# Altium PCB PCB1.PcbDoc (part 1 of 3)
Units mm, origin at the board's own origin, x right, y up, seen from the top; angles counter-clockwise.
Board outline 131.32 x 71.5 mm, 2 copper layers (Top Layer, Bottom Layer); 122 components, 132 nets, 671 pads, 363 vias.
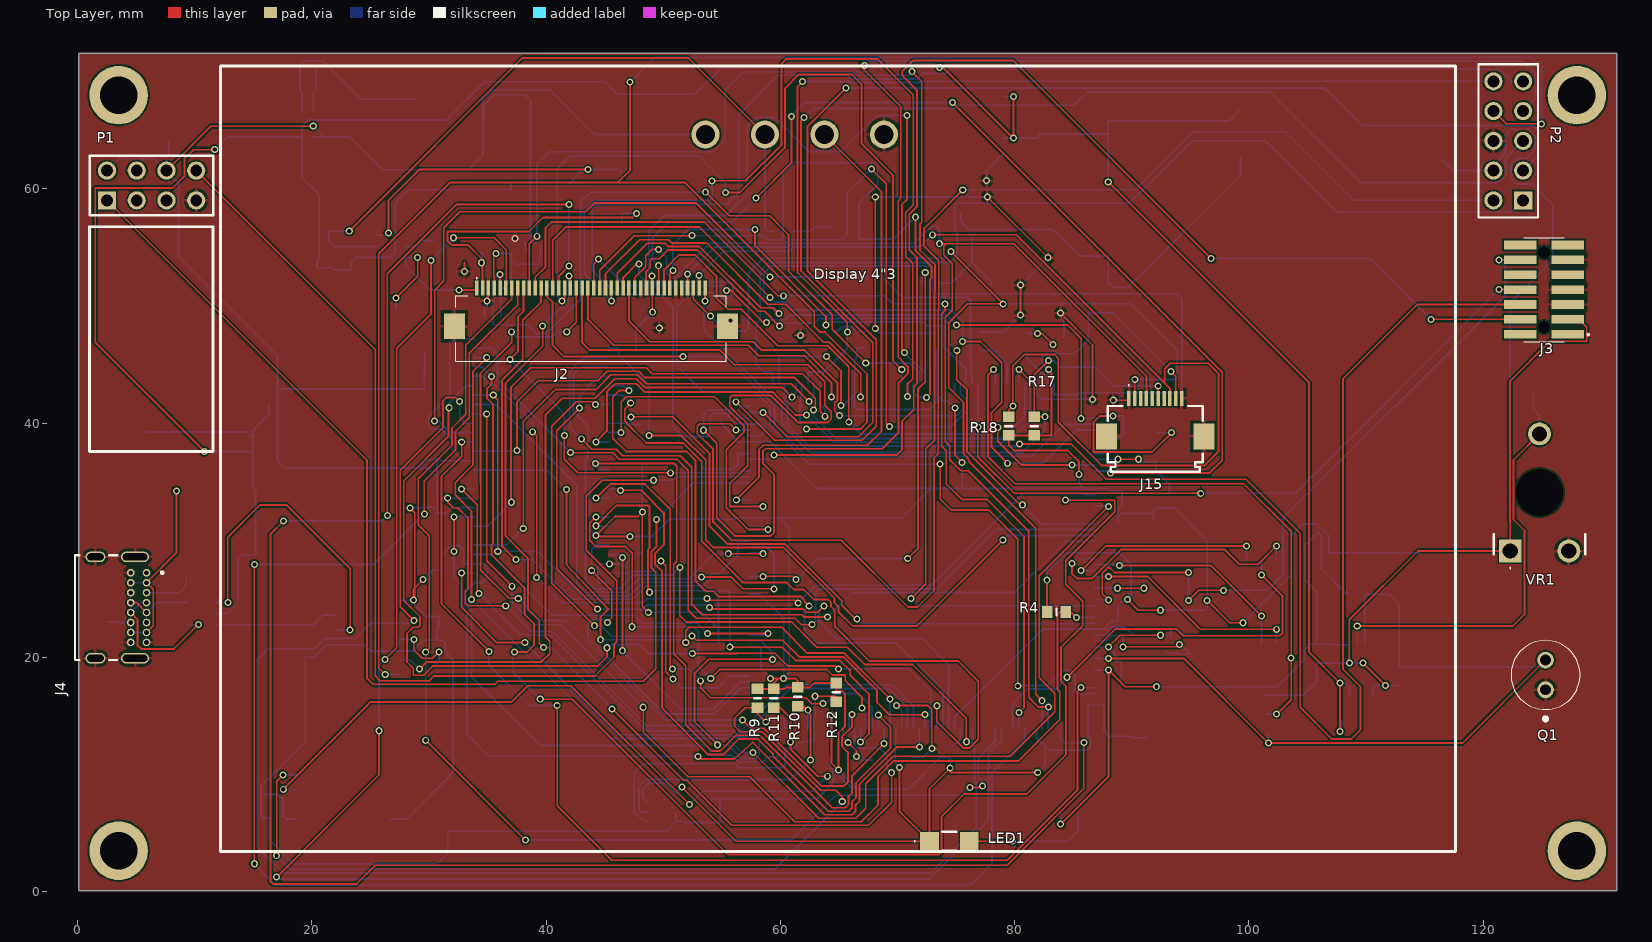
[diagram p0: Top Layer view]
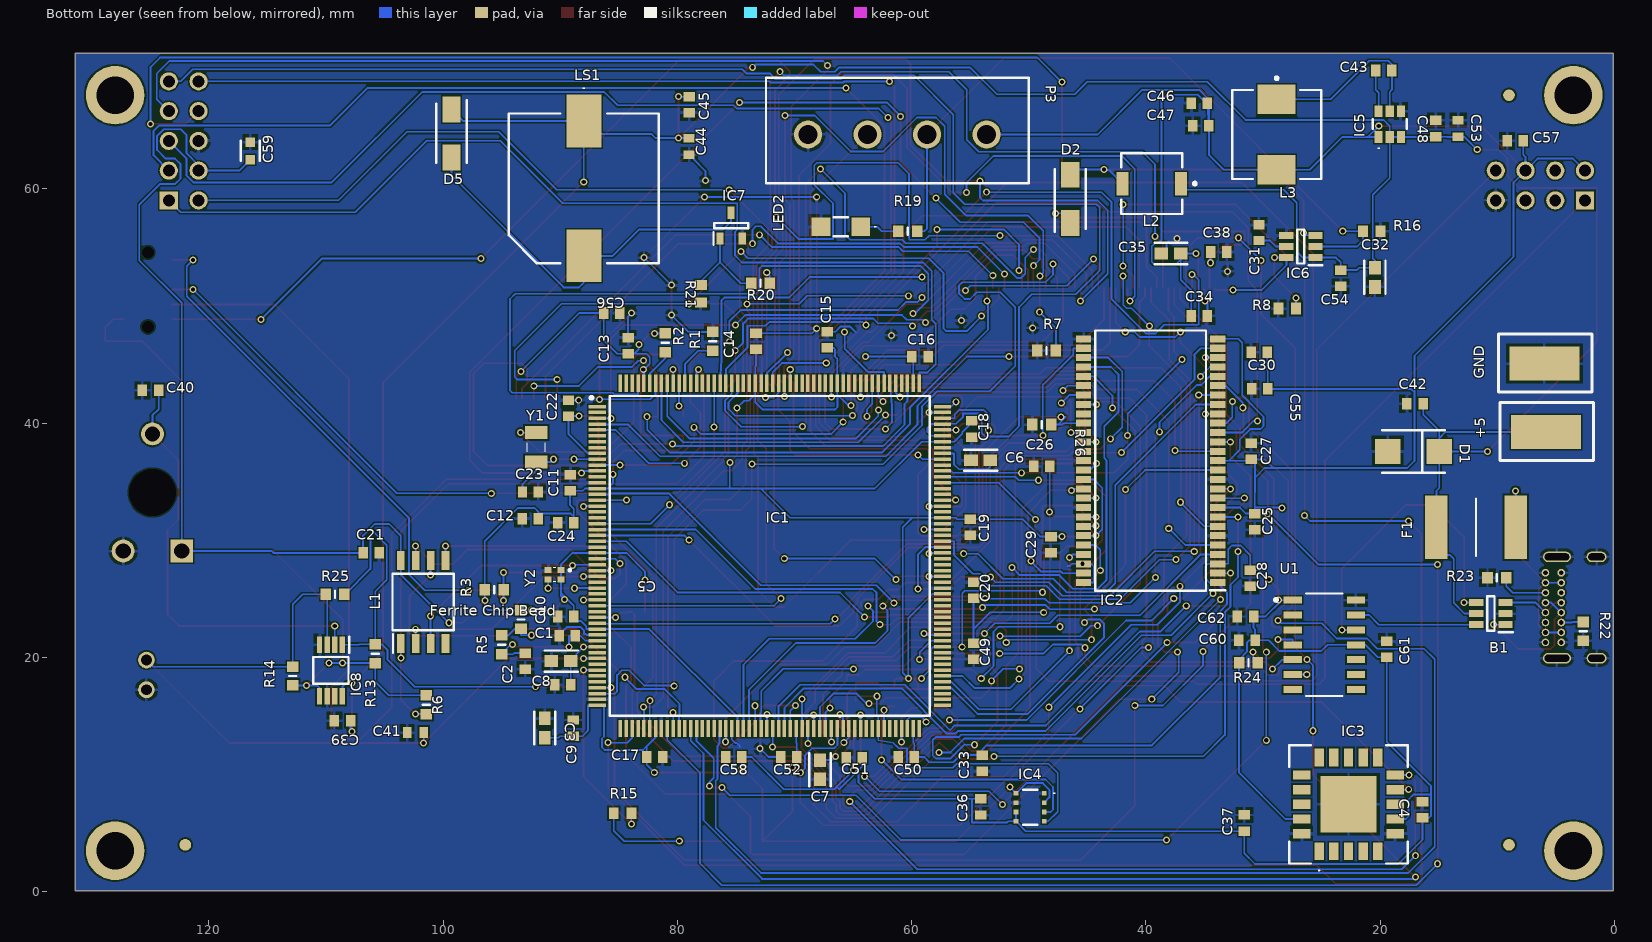
[diagram p1: Bottom Layer view, seen from below]
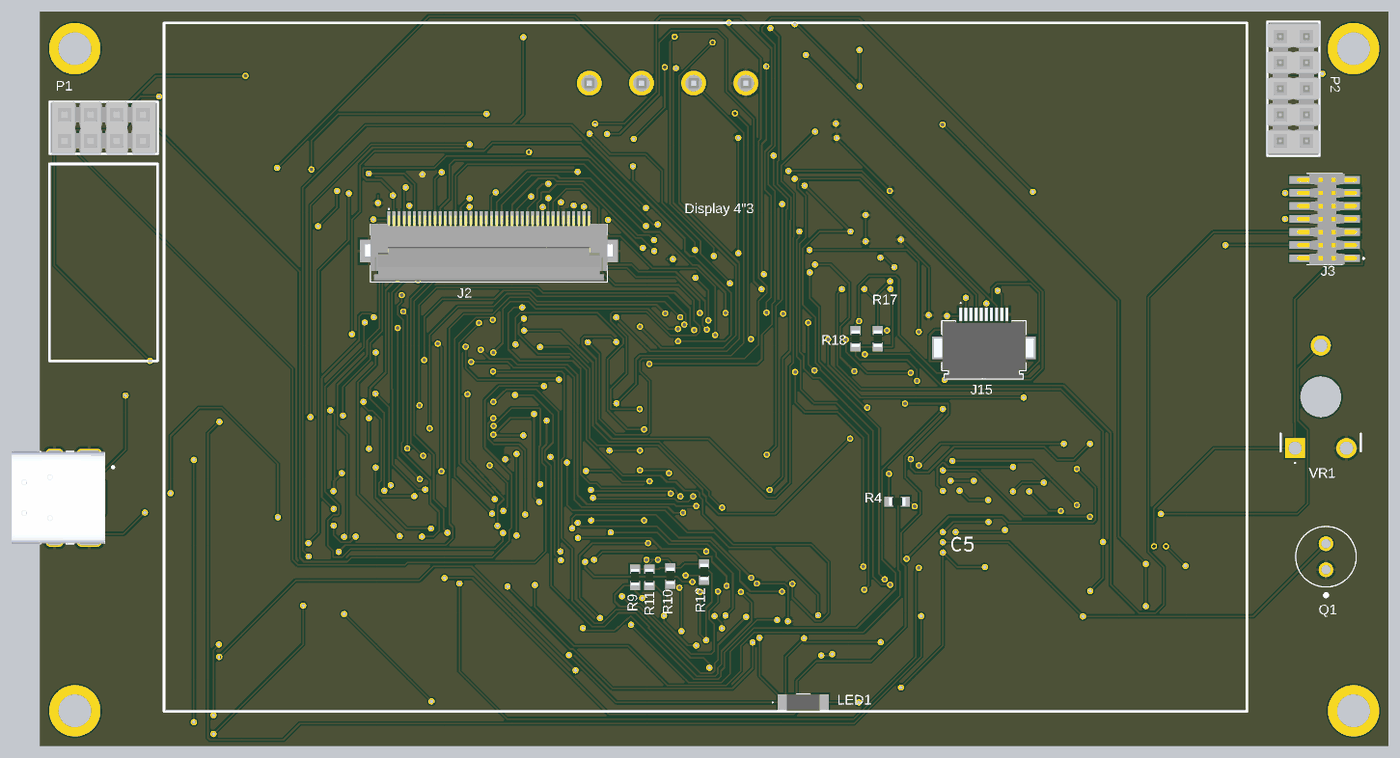
[diagram p4: 3D render of the assembled board from above, using the file's embedded part models]
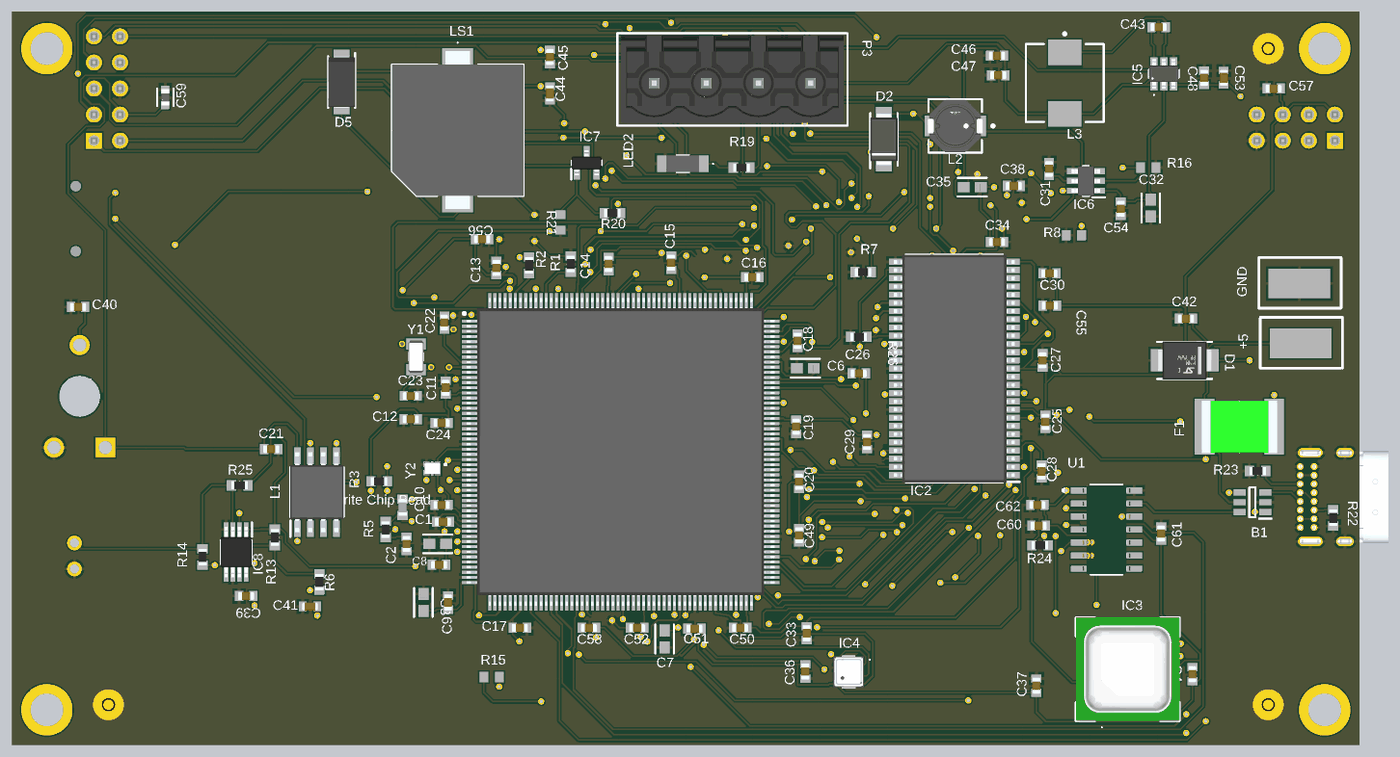
[diagram p5: 3D render of the assembled board from below, using the file's embedded part models]

## Layer stack, top to bottom
Top Solder: solder mask 0.0102, Solder Resist, Dk 3.5
Top Layer: signal copper 0.0356
Dielectric 1: dielectric 0.32, FR-4, Dk 4.8
Bottom Layer: signal copper 0.0356
Bottom Solder: solder mask 0.0102, Solder Resist, Dk 3.5

## Board outline
0.094,0.094 0.094,71.595 131.412,71.595 131.412,0.094

## Design rules (kind name [scope] priority, off if disabled: settings)
Clearance Clearance_OLTTTPPP [OnOutside] p1: gap=0.15 ignorepadtopadclearanceinfootprint=TRUE
Clearance Clearance_ILTTTPPP [All] p2: gap=0.15 ignorepadtopadclearanceinfootprint=TRUE except(0.2: Arc-Hole Track-Hole SMDPad-Hole THPad-Hole Via-Hole Fill-Hole Poly-Hole Region-Hole)
HoleSize [All] p1: absolutevalues=TRUE maxlimit=1000 minlimit=0.25 maxpercent=80.000 minpercent=20.000
HoleToHoleClearance HoleToHoleClearance_uVia_same_layer_inner [IsMicroVia and ((StartLayer = 'Inner 1') and (StopLayer = 'Inner 2')) vs IsMicroVia and ((StartLayer = 'Inner 1') and (StopLayer = 'Inner 2'))] p1: gap=0.2 allowstackedmicrovias=FALSE
HoleToHoleClearance HoleToHoleClearance_uVia_same_layer_top [IsMicroVia and ((StartLayer = 'Top Layer') and (StopLayer = 'Inner 1')) vs IsMicroVia and ((StartLayer = 'Top Layer') and (StopLayer = 'Inner 1'))] p2: gap=0.2 allowstackedmicrovias=FALSE
HoleToHoleClearance HoleToHoleClearance_uVia [IsMicroVia vs IsMicroVia] p3: gap=0.01 allowstackedmicrovias=FALSE
HoleToHoleClearance [All] p4: gap=0.2 allowstackedmicrovias=FALSE
MinimumAnnularRing MinimumAnnularRing_uVia [IsMicroVia] p1: minimumring=0.09
MinimumAnnularRing MinimumAnnularRing_OAR [OnOutside] p2: minimumring=0.125
MinimumAnnularRing MinimumAnnularRing_IAR [All] p3: minimumring=0.125
MinimumSolderMaskSliver [All] p1: minsoldermaskwidth=0.1
PolygonConnect [All] p1: connectstyle=Relief reliefconductorwidth=0.254 reliefentries=4 polygonreliefangle="90 Angle" airgapwidth=0.254
RoutingVias RoutingVias_uVia [IsMicroVia] p1: holewidth=0.1 width=0.28 viastyle="Through Hole" minholewidth=0.1 minwidth=0.28 maxholewidth=0.1 maxwidth=0.28
RoutingVias [All] p2: holewidth=0.35 width=0.6 viastyle="Through Hole" minholewidth=0.25 minwidth=0.5 maxholewidth=3 maxwidth=3.25
SilkToSolderMaskClearance [IsPad] p1: minsilkscreentomaskgap=0.15 clearancetoexposedcopper=TRUE
SolderMaskExpansion [All] p1: expansion=0 istentingtop=FALSE
SupplyNets "Schematic Supply Nets_4" [InNet('3V3')] p1: voltage=0.000
SupplyNets "Schematic Supply Nets_3" [InNet('+5')] p2: voltage=0.000
SupplyNets "Schematic Supply Nets_2" [InNet('VREF+')] p3: voltage=0.000
SupplyNets "Schematic Supply Nets_1" [InNet('VDDA')] p4: voltage=0.000
SupplyNets "Schematic Supply Nets" [InNet('GND')] p5: voltage=0.000
ViasUnderSMD [IsMicroVia] p1: allowed=TRUE
Width Width_ILTW [All] p1: maxlimit=3 minlimit=0.15 preferedwidth=0.15
26 further rules are at their usual default settings.

## Classes and differential pairs
component class Sheet2: +5 B1 C34 C42 C43 C46 C47 C48 C53 C60 C61 C62 D1 F1 GND IC5 J3 J4 L3 R22 R23 R24 U1
net class LCD_R[0..7]: LCD_R0 LCD_R1 LCD_R2 LCD_R3 LCD_R4 LCD_R5 LCD_R6 LCD_R7
net class LCD_G[0..7]: LCD_G0 LCD_G1 LCD_G2 LCD_G3 LCD_G4 LCD_G5 LCD_G6 LCD_G7
net class LCD_B[0..7]: LCD_B0 LCD_B1 LCD_B2 LCD_B3 LCD_B4 LCD_B5 LCD_B6 LCD_B7
net class SDRAM_D[0..15]: SDRAM_D0 SDRAM_D1 SDRAM_D2 SDRAM_D3 SDRAM_D4 SDRAM_D5 SDRAM_D6 SDRAM_D7 SDRAM_D8 SDRAM_D9 SDRAM_D10 SDRAM_D11 SDRAM_D12 SDRAM_D13 SDRAM_D14 SDRAM_D15
net class SDRAM_A[0..11]: SDRAM_A0 SDRAM_A1 SDRAM_A2 SDRAM_A3 SDRAM_A4 SDRAM_A5 SDRAM_A6 SDRAM_A7 SDRAM_A8 SDRAM_A9 SDRAM_A10 SDRAM_A11
component class Sheet6: C21 C22 C23 C24 C25 C26 C27 C28 C29 C30 C55 C57 C59 IC2 L1 P1 P2 R4 R6 R26 Y1 Y2
component class Sheet5: C31 C32 C35 C38 C54 C56 D2 IC6 J2 J15 L2 LED2 P3 R7 R8 R16 R17 R18 R19
component class Sheet3: C1 C2 C3 C5 C6 C7 C8 C9 C10 C11 C12 C13 C14 C15 C16 C17 C18 C19 C20 C49 C50 C51 C52 C58 "Ferrite Chip Bead" R5
component class Sheet4: C4 C33 C36 C37 C39 C40 C41 C44 C45 D5 IC3 IC4 IC7 IC8 LED1 LS1 Q1 R9 R10 R11 R12 R13 R14 R15 R20 R21 R25 VR1
component class Sheet1: IC1 R1 R2 R3

## Components (designator, comment, footprint, x,y, rotation, side; value= is the part's Value field where it differs from the comment)
+5 "1" ANT 6.096,39.624 r270 bottom
B1 "USBLC6-2SC6" SOT95P280X145-6N 10.541,23.749 r0 bottom
C1 "1uf" CAPC1608X95N 89.408,21.844 r180 bottom
C2 "100nf" CAPC1608X95N 92.964,19.685 r90 bottom
C3 "4.7uf" FP-CL10-IPC_A 91.313,13.97 r90 bottom
C4 "10Uf" CAPC1608X95N 16.383,6.985 r270 bottom
C5 "1UF" FP-CL10-IPC_A 89.916,19.685 r0 bottom
C6 "2.2uf" FP-CL10-IPC_A 54.102,36.83 r0 bottom
C7 "2.2uf" FP-CL10-IPC_A 67.818,10.414 r270 bottom
C8 "100nf" CAPC1608X95N 89.789,17.653 r180 bottom
C9 "100nf" CAPC1608X95N 88.9,13.97 r270 bottom
C10 "100nf" CAPC1608X95N 89.535,23.495 r180 bottom
C11 "100nf" CAPC1608X95N 89.154,34.925 r270 bottom
C12 "100nf" CAPC1608X95N 92.55,31.844 r180 bottom
C13 "100nf" CAPC1608X95N 84.201,46.609 r270 bottom
C14 "100nf" CAPC1608X95N 73.279,46.99 r270 bottom
C15 "100nf" CAPC1608X95N 67.183,47.117 r270 bottom
C16 "100nf" CAPC1608X95N 59.276,45.687 r0 bottom
C17 "100nf" CAPC1608X95N 81.915,11.5 r0 bottom
C18 "100nf" CAPC1608X95N 54.864,39.497 r90 bottom
C19 "100nf" CAPC1608X95N 54.991,31.115 r90 bottom
C20 "100nf" CAPC1608X95N 54.704,25.748 r270 bottom
C21 "100nf" CAPC1608X95N 106.139,28.923 r0 bottom
C22 "18pf" CAPC1608X87N 89.281,41.275 r270 bottom
C23 "18pf" CAPC1608X87N 92.55,34.13 r0 bottom
C24 "100nf" CAPC1608X95N 89.535,31.496 r180 bottom
C25 "100nf" CAPC1608X95N 30.701,31.59 r90 bottom
C26 "100nf" CAPC1608X95N 48.895,36.322 r180 bottom
C27 "100nf" CAPC1608X95N 30.988,37.592 r270 bottom
C28 "100nf" CAPC1608X95N 31.082,26.764 r90 bottom
C29 "100nf" CAPC1608X95N 48.1,29.634 r90 bottom
C30 "100nf" CAPC1608X95N 30.32,46.068 r180 bottom
C31 "220nF" CAPC1608X87N 30.353,56.261 r270 bottom
C32 "4.7uf" FP-CL10-IPC_A 20.447,52.451 r270 bottom
C33 "100nf" CAPC1608X95N 53.975,10.977 r90 bottom
C34 "100nf" CAPC1608X95N 35.433,49.149 r0 bottom
C35 "4.7uf" FP-CL10-IPC_A 37.846,54.483 r0 bottom
C36 "100nf" CAPC1608X95N 54.102,7.239 r90 bottom
C37 "100nf" CAPC1608X95N 31.59,5.86 r270 bottom
C38 "4.7uf" CAPC1608X95N 33.782,54.61 r0 bottom
C39 "100nf" CAPC1608X95N 108.585,14.605 r180 bottom
C40 "100nf" CAPC1608X95N 124.968,42.799 r180 bottom
C41 "0.47uf" CAPC1608X90N 102.362,13.589 r180 bottom
C42 "100nf" CAPC1608X95N 17.018,41.656 r180 bottom
C43 "100nf" CAPC1608X95N 19.685,70.104 r0 bottom
C44 "10uf" CAPC1608X90N 78.994,63.627 r90 bottom
C45 "100nf" CAPC1608X95N 78.994,67.183 r90 bottom
C46 "22uf" CAPC1608X95N 35.433,67.31 r180 bottom
C47 "22uf" CAPC1608X95N 35.306,65.405 r180 bottom
C48 "100nf" CAPC1608X95N 15.24,65.151 r270 bottom
C49 "100nf" CAPC1608X95N 54.704,20.541 r90 bottom
C50 "100nf" CAPC1608X95N 60.452,11.5 r180 bottom
C51 "100nf" CAPC1608X95N 64.897,11.43 r180 bottom
C52 "100nf" CAPC1608X95N 70.485,11.5 r180 bottom
C53 "10UF" CAPC1608X90N 13.335,65.151 r270 bottom
C54 "100nf" CAPC1608X95N 23.368,52.379 r90 bottom
C55 "4.7uf" CAPC1608X95N 30.281,42.926 r180 bottom
C56 "100nf" CAPC1608X95N 85.598,49.403 r0 bottom
C57 "100nf" CAPC1608X95N 8.476,64.102 r0 bottom
C58 "100nf" CAPC1608X95N 75.184,11.5 r180 bottom
C59 "100nf" FP-VJ0603X-MFG 116.459,63.246 r90 bottom
C60 "100nf" CAPC1608X95N 31.369,21.463 r180 bottom
C61 "330nf" CAPC1608X95N 19.431,20.701 r270 bottom
C62 "100nf" CAPC1608X95N 31.496,23.495 r180 bottom
D1 "SMBJ5.0A" SMBJ12A 17.145,37.592 r0 bottom
D2 "SS16-E3_61T" DIOM5127X229N 46.449,59.149 r90 bottom
D5 "SS14" DIOM5026X262N 99.281,64.737 r270 bottom
F1 "0ZCF0300BF2C" FUSC7451X115N 11.811,31.115 r0 bottom
"Ferrite Chip Bead" "FCM1608KF-601T03" BEADC1608X95N 93.345,23.241 r270 bottom
GND "1" ANT 6.223,45.466 r270 bottom
IC1 "STM32F746BGT6" QFP50P3000X3000X160-208N 72.103,28.669 r180 bottom
IC2 "IS42S16400J-7TLI" SOP80P1176X120-54N 39.591,36.797 r0 bottom
IC3 "SCD41-D-R1" SCD41DR1 22.7,7.46 r90 bottom
IC4 "BME688" BME688 49.878,7.206 r180 bottom
IC5 "AP63203WU-7" AP63203WU7 19.177,65.532 r180 bottom
IC6 "TPS61165DBVT" SOT95P280X145-6N 26.764,55.085 r0 bottom
IC7 "2N7002P,235" SOT95P230X110-3N 75.405,56.863 r90 bottom
IC8 "LMV393MM_NOPB" SOP65P490X110-8N 109.568,18.89 r270 bottom
J2 "FH12-40S-0.5SH_55_" FH1240S05SH55 43.817,48.854 r0 top
J3 "FTSH-107-01-L-DV-K-A" FTSH-107-XX-YYY-DV-K-A 125.186,51.402 r90 top
J4 "USB4085-GF-A_REVA4" GCT_USB4085-GF-A_REVA4 1.524,24.257 r270 top
J15 "FH12-10S-0.5SH_55_" FH1210S05SH55 92,38.989 r0 top
L1 "W25Q128JVSIQ_TR" SOIC127P780X195-8N 101.694,24.732 r90 bottom
L2 "#A915AY-100M=P3" FP-D53LC-MFG 39.497,60.452 r0 bottom
L3 "DR74-4R7-R" COBU-DR74-4R7-R_V 28.829,64.643 r270 bottom
LED1 "KPTL-3216SURCK-01-VS" KPTL3216SURCK01VS 74.422,4.318 r0 top
LED2 "KPTL-3216SURCK-01-VS" KPTL3216SURCK01VS 66.04,56.769 r0 bottom
LS1 "SMI-1324-TW-5V-3-R" SMI1324TW5V3R 87.978,60.038 r90 bottom
P1 "ESP-01" SMTC-MTSW-104-12-X-D-006 2.507,59.022 r0 top
P2 "TSW-105-05-G-D" SMTC-TSW-105-05-X-D 123.411,59.022 r90 top
P3 "691701510004B" 691701510004B 61.214,64.993 r180 bottom
Q1 "PT334-6B" PT3346B 125.316,17.239 r90 top
R1 "10k" RESC1608X55N 76.962,46.99 r90 bottom
R2 "10k" RESC1608X55N 81.026,46.863 r270 bottom
R3 "10k" RESC1608X55N 95.631,25.781 r0 bottom
R4 "10k" RESC1608X55N 83.566,23.876 r0 top
R5 "47" RESC1608X55N 94.996,21.082 r90 bottom
R6 "10k" RESC1608X55N 101.44,15.969 r270 bottom
R7 "4k7" RESC1608X55N 48.481,46.195 r180 bottom
R8 "10 OHM" RESC1608X50N 27.94,49.784 r180 bottom
R9 "4k7" RESC1608X55N 58.039,16.51 r90 top
R10 "4k7" RESC1608X55N 61.468,16.637 r90 top
R11 "4k7" RESC1608X55N 59.436,16.51 r270 top
R12 "4k7" RESC1608X55N 64.77,17.018 r270 top
R13 "10k" RESC1608X55N 105.791,20.32 r90 bottom
R14 "10k" RESC1608X55N 112.838,18.415 r90 bottom
R15 "1k" RESC1608X50N 84.676,6.698 r0 bottom
R16 "100k" RESC1608X50N 20.701,56.388 r180 bottom
R17 "4k7" RESC1608X55N 81.661,39.751 r270 top
R18 "4k7" RESC1608X55N 79.502,39.751 r270 top
R19 "4k7" RESC1608X55N 60.325,56.388 r180 bottom
R20 "100 OHM" RESC1608X55N 72.898,51.943 r0 bottom
R21 "10K" RESC1608X50N 77.978,51.054 r90 bottom
R22 "5.1 kΩ, 1%" RESC1608X55N 2.667,22.225 r90 bottom
R23 "5.1 kΩ, 1%" RESC1608X55N 10.033,26.797 r180 bottom
R24 "10K" RESC1608X55N 31.242,19.558 r180 bottom
R25 "1M" RESC1608X55N 109.22,25.4 r0 bottom
R26 "10k" RESC1608X55N 48.895,39.878 r180 bottom
U1 "MCP2221A-I/SL" FP-C04-065-SL-MFG 24.765,21.082 r180 bottom
VR1 "PT10MV11-104A2020-S" PT10MV11104A2020S 122.308,29.083 r0 top
Y1 "ABS07-32.768KHZ-T" ABS07 92.042,37.94 r270 bottom
Y2 "ASCO-8.000MHZ-EK-T3" ASCO16000MHZEKT 90.17,27.051 r0 bottom

## Footprints (in the part's own frame and the unit in brackets; to place one, negate y for a bottom-side part, rotate by r counter-clockwise, add the part's x,y. Pads: shape width x height; smd on the part's side, far side on the other; paste and mask are expansions set on the pad)
691701510004B [mm] "THR - 5,08mm - PCB Vertical Close - 04p"
  round 2.4 hole 1.6: 1(-7.62,-0.35) 2(-2.54,-0.35) 3(2.54,-0.35) 4(7.62,-0.35)
  silkscreen extent -11.21,-4.5 11.21,4.5, body extent -10.86,-4.25 10.86,4.25, height 12.1
ABS07 [mm]
  rect 1.1x1.9 smd: 1(-1.25,0) 2(1.25,0)
  silkscreen extent -0.4,-0.75 0.4,0.75, body extent -1.6,-0.75 1.6,0.75, height 0.9
ANT [mm]
  rect 2.88x6 smd: 1(0.381,0.254)
  silkscreen extent -2.16,-3.68 2.79,4.32
AP63203WU7 [mm]
  rect 0.7x1 smd: 1(-0.95,-1.099) 2(0,-1.099) 3(0.95,-1.099) 4(0.95,1.099) 5(0,1.099) 6(-0.95,1.099)
  silkscreen extent -1.45,-2.1 1.45,0.4, body extent -1.45,-1.45 1.45,1.45, height 1
ASCO16000MHZEKT [mm]
  rect 0.6x0.5 smd: 1(-0.25,-0.4) 2(0.85,-0.4) 3(0.85,0.4) 4(-0.25,0.4)
  silkscreen extent -1.1,-0.6 0.4,0.6, body extent -0.52,-0.6 1.08,0.6, height 0.7
BEADC1608X95N [mm]
  rect 0.9x1 smd: 1(-0.8,0) 2(0.8,0)
  silkscreen extent 0,-0.3 0,0.3, body extent -0.8,-0.4 0.8,0.4, height 0.95
BME688 [mm]
  rect 0.4x0.4 smd: 1(1.2,1.2) 2(1.2,0.4) 3(1.2,-0.4) 4(1.2,-1.2) 5(-1.2,-1.2) 6(-1.2,-0.4) 7(-1.2,0.4) 8(-1.2,1.2)
  silkscreen extent -0.6,-1.5 2.1,1.5, body extent -1.5,-1.5 1.5,1.5, height 0.93
CAPC1608X87N [mm]
  rect 0.8x0.94 smd: 1(-0.67,0) 2(0.67,0)
  body extent -0.8,-0.4 0.8,0.4, height 0.87
CAPC1608X90N [mm]
  rect 0.73x0.94 smd: 1(-0.71,0) 2(0.71,0)
  body extent -0.8,-0.4 0.8,0.4, height 0.9
CAPC1608X95N [mm]
  rect 0.81x0.99 smd: 1(-0.69,0) 2(0.69,0)
  body extent -0.81,-0.41 0.81,0.41, height 0.95
COBU-DR74-4R7-R_V [mm] "SMD, 2-Leads, Body 7.6x7.6mm"
  rect 2.5x3.25 smd: 1(-3,0) 2(3,0)
  silkscreen extent -4.92,-3.8 3.8,3.8, body extent -3.8,-3.8 3.8,3.8, height 4.35
DIOM5026X262N [mm]
  rect 2.2x1.55 smd: 1(-2.05,0) 2(2.05,0)
  silkscreen extent -2.82,-1.31 2.52,1.31, body extent -2.52,-1.31 2.52,1.31, height 2.62
DIOM5127X229N [mm]
  rect 2.2x1.55 smd: 1(-2.05,0) 2(2.05,0)
  silkscreen extent -2.83,-1.33 2.55,1.33, body extent -2.55,-1.33 2.55,1.33, height 2.29
FH1210S05SH55 [mm]
  rect 0.3x1.3 smd: 1(-2.25,3.125) 2(-1.75,3.125) 3(-1.25,3.125) 4(-0.75,3.125) 5(-0.25,3.125) 6(0.25,3.125) 7(0.75,3.125) 8(1.25,3.125) 9(1.75,3.125) 10(2.25,3.125)
  rect 1.8x2.2 smd: 11(-4.15,-0.125) 12(4.15,-0.125)
  silkscreen extent -4.05,-3.13 4.05,4.3, body extent -4.87,-3.13 4.87,3.74, height 2.3
FH1240S05SH55 [mm]
  rect 0.3x1.3 smd: 1(-9.75,2.675) 2(-9.25,2.675) 3(-8.75,2.675) 4(-8.25,2.675) 5(-7.75,2.675) 6(-7.25,2.675) 7(-6.75,2.675) 8(-6.25,2.675) 9(-5.75,2.675) 10(-5.25,2.675) 11(-4.75,2.675) 12(-4.25,2.675) 13(-3.75,2.675) 14(-3.25,2.675) 15(-2.75,2.675) 16(-2.25,2.675) 17(-1.75,2.675) 18(-1.25,2.675) 19(-0.75,2.675) 20(-0.25,2.675) 21(0.25,2.675) 22(0.75,2.675) 23(1.25,2.675) 24(1.75,2.675) 25(2.25,2.675) 26(2.75,2.675) 27(3.25,2.675) 28(3.75,2.675) 29(4.25,2.675) 30(4.75,2.675) 31(5.25,2.675) 32(5.75,2.675) 33(6.25,2.675) 34(6.75,2.675) 35(7.25,2.675) 36(7.75,2.675) 37(8.25,2.675) 38(8.75,2.675) 39(9.25,2.675) 40(9.75,2.675)
  rect 1.8x2.2 smd: 41(-11.65,-0.575) 42(11.65,-0.575)
  silkscreen extent -11.55,-3.57 11.55,3.57, body extent -12.05,-3.52 12.05,2.88, height 2
FP-C04-065-SL-MFG [mm]
  rect 1.55x0.6 smd paste+0 mask+0: 1(-2.7,3.81) 2(-2.7,2.54) 3(-2.7,1.27) 4(-2.7,0) 5(-2.7,-1.27) 6(-2.7,-2.54) 7(-2.7,-3.81) 8(2.7,-3.81) 9(2.7,-2.54) 10(2.7,-1.27) 11(2.7,0) 12(2.7,1.27) 13(2.7,2.54) 14(2.7,3.81)
  silkscreen extent -4.25,-4.37 1.55,4.37, body extent -3,-4.33 3,4.33, height 1.75
FP-CL10-IPC_A [mm]
  rect 1.158x1.012 smd paste+0 mask+0: 1(-0.827,0) 2(0.827,0)
  silkscreen extent -1.41,-0.91 1.41,0.91, body extent -0.8,-0.4 0.8,0.4, height 0.9
FP-D53LC-MFG [mm]
  rect 1x2 smd paste+0 mask+0: 1(-2.5,0) 2(2.5,0)
  silkscreen extent -3.8,-2.6 2.6,2.6, body extent -2.7,-2.55 2.7,2.55, height 3
FP-VJ0603X-MFG [mm]
  rect 0.8x0.8 smd paste+0 mask+0: 1(-0.75,0) 2(0.75,0)
  silkscreen extent -0.85,-0.8 0.85,0.8, body extent -0.8,-0.4 0.8,0.4, height 0.95
FTSH-107-XX-YYY-DV-K-A [mm]
  rect 0.74x2.79 smd: 1(-3.81,-2.035) 2(-3.81,2.035) 3(-2.54,-2.035) 4(-2.54,2.035) 5(-1.27,-2.035) 6(-1.27,2.035) 7(0,-2.035) 8(0,2.035) 9(1.27,-2.035) 10(1.27,2.035) 11(2.54,-2.035) 12(2.54,2.035) 13(3.81,-2.035) 14(3.81,2.035)
  round 0.51 hole 1.02 unplated: 15(-3.175,0) 16(3.175,0)
  silkscreen extent -4.45,-3.83 4.44,1.72, body extent -4.44,-3.15 4.45,2.69, height 5.97
FUSC7451X115N [mm]
  rect 1.92x5.45 smd: 1(-3.385,0) 2(3.385,0)
  silkscreen extent 0,-2.46 0,2.46, body extent -3.68,-2.56 3.68,2.56, height 1.15
GCT_USB4085-GF-A_REVA4 [mm]
  round 0.65 hole 0.4: A1(-2.975,4.36) A4(-2.125,4.36) A5(-1.275,4.36) A6(-0.425,4.36) A7(0.425,4.36) A8(1.275,4.36) A9(2.125,4.36) A12(2.975,4.36) B1(2.975,3.01) B4(2.125,3.01) B5(1.275,3.01) B6(0.425,3.01) B7(-0.425,3.01) B8(-1.275,3.01) B9(-2.125,3.01) B12(-2.975,3.01)
  oval 0.9x1.7 hole 0.6 slot 1.4 at 90 deg: S1(-4.325,0) S2(4.325,0)
  oval 0.9x2.4 hole 0.6 slot 2.1 at 90 deg: S3(-4.325,3.38) S4(4.325,3.38)
  silkscreen extent -4.47,-1.74 4.47,5.8, body extent -4.47,-4.25 4.47,4.92, height 3.46
KPTL3216SURCK01VS [mm]
  rect 1.6x1.6 smd: 1(-1.7,0) 2(1.7,0)
  silkscreen extent -3,-0.8 0.6,0.8, body extent -1.6,-0.8 1.6,0.8, height 1.3
PT10MV11104A2020S [mm]
  rect 1.95x1.95 hole 1.3: A1(0,0)
  round 1.95 hole 1.3: E1(5,0) S1(2.5,10)
  round 2 hole 4 unplated: MH1(2.5,5)
  silkscreen extent -1.4,-1.5 6.4,1.42
PT3346B [mm]
  round 1.42 hole 0.92: 1(0,0) 2(2.54,0)
  silkscreen extent -2.63,-2.95 4.22,2.95
QFP50P3000X3000X160-208N [mm]
  rect 1.475x0.3 smd: 1(-14.738,12.75) 2(-14.738,12.25) 3(-14.738,11.75) 4(-14.738,11.25) 5(-14.738,10.75) 6(-14.738,10.25) 7(-14.738,9.75) 8(-14.738,9.25) 9(-14.738,8.75) 10(-14.738,8.25) 11(-14.738,7.75) 12(-14.738,7.25) 13(-14.738,6.75) 14(-14.738,6.25) 15(-14.738,5.75) 16(-14.738,5.25) 17(-14.738,4.75) 18(-14.738,4.25) 19(-14.738,3.75) 20(-14.738,3.25) 21(-14.738,2.75) 22(-14.738,2.25) 23(-14.738,1.75) 24(-14.738,1.25) 25(-14.738,0.75) 26(-14.738,0.25) 27(-14.738,-0.25) 28(-14.738,-0.75) 29(-14.738,-1.25) 30(-14.738,-1.75) 31(-14.738,-2.25) 32(-14.738,-2.75) 33(-14.738,-3.25) 34(-14.738,-3.75) 35(-14.738,-4.25) 36(-14.738,-4.75) 37(-14.738,-5.25) 38(-14.738,-5.75) 39(-14.738,-6.25) 40(-14.738,-6.75) 41(-14.738,-7.25) 42(-14.738,-7.75) 43(-14.738,-8.25) 44(-14.738,-8.75) 45(-14.738,-9.25) 46(-14.738,-9.75) 47(-14.738,-10.25) 48(-14.738,-10.75) 49(-14.738,-11.25) 50(-14.738,-11.75) 51(-14.738,-12.25) 52(-14.738,-12.75) 105(14.738,-12.75) 106(14.738,-12.25) 107(14.738,-11.75) 108(14.738,-11.25) 109(14.738,-10.75) 110(14.738,-10.25) 111(14.738,-9.75) 112(14.738,-9.25) 113(14.738,-8.75) 114(14.738,-8.25) 115(14.738,-7.75) 116(14.738,-7.25) 117(14.738,-6.75) 118(14.738,-6.25) 119(14.738,-5.75) 120(14.738,-5.25) 121(14.738,-4.75) 122(14.738,-4.25) 123(14.738,-3.75) 124(14.738,-3.25) 125(14.738,-2.75) 126(14.738,-2.25) 127(14.738,-1.75) 128(14.738,-1.25) 129(14.738,-0.75) 130(14.738,-0.25) 131(14.738,0.25) 132(14.738,0.75) 133(14.738,1.25) 134(14.738,1.75) 135(14.738,2.25) 136(14.738,2.75) 137(14.738,3.25) 138(14.738,3.75) 139(14.738,4.25) 140(14.738,4.75) 141(14.738,5.25) 142(14.738,5.75) 143(14.738,6.25) 144(14.738,6.75) 145(14.738,7.25) 146(14.738,7.75) 147(14.738,8.25) 148(14.738,8.75) 149(14.738,9.25) 150(14.738,9.75) 151(14.738,10.25) 152(14.738,10.75) 153(14.738,11.25) 154(14.738,11.75) 155(14.738,12.25) 156(14.738,12.75)
  rect 0.3x1.475 smd: 53(-12.75,-14.738) 54(-12.25,-14.738) 55(-11.75,-14.738) 56(-11.25,-14.738) 57(-10.75,-14.738) 58(-10.25,-14.738) 59(-9.75,-14.738) 60(-9.25,-14.738) 61(-8.75,-14.738) 62(-8.25,-14.738) 63(-7.75,-14.738) 64(-7.25,-14.738) 65(-6.75,-14.738) 66(-6.25,-14.738) 67(-5.75,-14.738) 68(-5.25,-14.738) 69(-4.75,-14.738) 70(-4.25,-14.738) 71(-3.75,-14.738) 72(-3.25,-14.738) 73(-2.75,-14.738) 74(-2.25,-14.738) 75(-1.75,-14.738) 76(-1.25,-14.738) 77(-0.75,-14.738) 78(-0.25,-14.738) 79(0.25,-14.738) 80(0.75,-14.738) 81(1.25,-14.738) 82(1.75,-14.738) 83(2.25,-14.738) 84(2.75,-14.738) 85(3.25,-14.738) 86(3.75,-14.738) 87(4.25,-14.738) 88(4.75,-14.738) 89(5.25,-14.738) 90(5.75,-14.738) 91(6.25,-14.738) 92(6.75,-14.738) 93(7.25,-14.738) 94(7.75,-14.738) 95(8.25,-14.738) 96(8.75,-14.738) 97(9.25,-14.738) 98(9.75,-14.738) 99(10.25,-14.738) 100(10.75,-14.738) 101(11.25,-14.738) 102(11.75,-14.738) 103(12.25,-14.738) 104(12.75,-14.738) 157(12.75,14.738) 158(12.25,14.738) 159(11.75,14.738) 160(11.25,14.738) 161(10.75,14.738) 162(10.25,14.738) 163(9.75,14.738) 164(9.25,14.738) 165(8.75,14.738) 166(8.25,14.738) 167(7.75,14.738) 168(7.25,14.738) 169(6.75,14.738) 170(6.25,14.738) 171(5.75,14.738) 172(5.25,14.738) 173(4.75,14.738) 174(4.25,14.738) 175(3.75,14.738) 176(3.25,14.738) 177(2.75,14.738) 178(2.25,14.738) 179(1.75,14.738) 180(1.25,14.738) 181(0.75,14.738) 182(0.25,14.738) 183(-0.25,14.738) 184(-0.75,14.738) 185(-1.25,14.738) 186(-1.75,14.738) 187(-2.25,14.738) 188(-2.75,14.738) 189(-3.25,14.738) 190(-3.75,14.738) 191(-4.25,14.738) 192(-4.75,14.738) 193(-5.25,14.738) 194(-5.75,14.738) 195(-6.25,14.738) 196(-6.75,14.738) 197(-7.25,14.738) 198(-7.75,14.738) 199(-8.25,14.738) 200(-8.75,14.738) 201(-9.25,14.738) 202(-9.75,14.738) 203(-10.25,14.738) 204(-10.75,14.738) 205(-11.25,14.738) 206(-11.75,14.738) 207(-12.25,14.738) 208(-12.75,14.738)
  silkscreen extent -15.35,-13.65 13.65,13.65, body extent -15,-15 15,15, height 1.6
RESC1608X50N [mm]
  rect 0.85x1 smd: 1(-0.75,0) 2(0.75,0)
RESC1608X55N [mm]
  rect 0.9x1 smd: 1(-0.8,0) 2(0.8,0)
  silkscreen extent 0,-0.3 0,0.3, body extent -0.8,-0.4 0.8,0.4, height 0.55
SCD41DR1 [mm]
  rect 1.5x0.8 smd: 1(-4,2.5) 2(-4,1.25) 3(-4,0) 4(-4,-1.25) 5(-4,-2.5) 11(4,-2.5) 12(4,-1.25) 13(4,0) 14(4,1.25) 15(4,2.5)
  rect 0.8x1.5 smd: 6(-2.5,-4) 7(-1.25,-4) 8(0,-4) 9(1.25,-4) 10(2.5,-4) 16(2.5,4) 17(1.25,4) 18(0,4) 19(-1.25,4) 20(-2.5,4)
  rect 4.8x4.8 smd: 21(0,0)
  silkscreen extent -5.7,-5.05 5.05,5.05, body extent -5.05,-5.05 5.05,5.05, height 6.31
SMBJ12A [mm]
  rect 2.2x2.15 smd: 1(-2.2,0) 2(2.2,0)
  silkscreen extent -2.67,-1.81 2.68,1.81, body extent -2.68,-1.86 2.68,1.86, height 2.33
SMI1324TW5V3R [mm]
  rect 4.5x3 smd: 1(5.75,0) 2(-5.75,0)
  silkscreen extent -6.4,-6.4 8.6,6.4, body extent -7.7,-6.4 7.7,6.4, height 7.6
SMTC-MTSW-104-12-X-D-006 [mm] "Assembly .025\" [.64] SQ Post Terminal Strip, 2x4 Pins, Vertical, 2.54mm Pitch, Male"
  rect 1.55x1.55 hole 1.02: 1(0,0)
  round 1.55 hole 1.02: 2(0,2.54) 3(2.54,0) 4(2.54,2.54) 5(5.08,0) 6(5.08,2.54) 7(7.62,0) 8(7.62,2.54)
  silkscreen extent -1.46,-1.27 9.08,3.81, body extent -1.27,-1.27 8.89,3.81, height 2.69
SMTC-TSW-105-05-X-D [mm] ".025 SQ Post Terminal Strip Assembly, 2x5 Pins, Vertical, 2.54mm Pitch, Male"
  rect 1.55x1.55 hole 1.02: 1(0,0)
  round 1.55 hole 1.02: 2(0,2.54) 3(2.54,0) 4(2.54,2.54) 5(5.08,0) 6(5.08,2.54) 7(7.62,0) 8(7.62,2.54) 9(10.16,0) 10(10.16,2.54)
  silkscreen extent -1.46,-1.27 11.62,3.81, body extent -1.27,-1.27 11.43,3.81, height 5.21
SOIC127P780X195-8N [mm]
  rect 1.6x0.65 smd: 1(-3.55,1.905) 2(-3.55,0.635) 3(-3.55,-0.635) 4(-3.55,-1.905) 5(3.55,-1.905) 6(3.55,-0.635) 7(3.55,0.635) 8(3.55,1.905)
  silkscreen extent -4.35,-2.62 2.4,2.61, body extent -3.9,-2.62 3.9,2.62, height 1.95
SOP65P490X110-8N [mm]
  rect 1.4x0.45 smd: 1(-2.2,0.975) 2(-2.2,0.325) 3(-2.2,-0.325) 4(-2.2,-0.975) 5(2.2,-0.975) 6(2.2,-0.325) 7(2.2,0.325) 8(2.2,0.975)
  silkscreen extent -2.9,-1.5 1.15,1.55, body extent -2.45,-1.5 2.45,1.5, height 1.1
SOP80P1176X120-54N [mm]
  rect 1.295x0.6 smd: 1(-5.728,10.4) 2(-5.728,9.6) 3(-5.728,8.8) 4(-5.728,8) 5(-5.728,7.2) 6(-5.728,6.4) 7(-5.728,5.6) 8(-5.728,4.8) 9(-5.728,4) 10(-5.728,3.2) 11(-5.728,2.4) 12(-5.728,1.6) 13(-5.728,0.8) 14(-5.728,0) 15(-5.728,-0.8) 16(-5.728,-1.6) 17(-5.728,-2.4) 18(-5.728,-3.2) 19(-5.728,-4) 20(-5.728,-4.8) 21(-5.728,-5.6) 22(-5.728,-6.4) 23(-5.728,-7.2) 24(-5.728,-8) 25(-5.728,-8.8) 26(-5.728,-9.6) 27(-5.728,-10.4) 28(5.728,-10.4) 29(5.728,-9.6) 30(5.728,-8.8) 31(5.728,-8) 32(5.728,-7.2) 33(5.728,-6.4) 34(5.728,-5.6) 35(5.728,-4.8) 36(5.728,-4) 37(5.728,-3.2) 38(5.728,-2.4) 39(5.728,-1.6) 40(5.728,-0.8) 41(5.728,0) 42(5.728,0.8) 43(5.728,1.6) 44(5.728,2.4) 45(5.728,3.2) 46(5.728,4) 47(5.728,4.8) 48(5.728,5.6) 49(5.728,6.4) 50(5.728,7.2) 51(5.728,8) 52(5.728,8.8) 53(5.728,9.6) 54(5.728,10.4)
  silkscreen extent -6.38,-11.11 4.73,11.11, body extent -5.88,-11.11 5.88,11.11, height 1.2
SOT95P230X110-3N [mm]
  rect 1.05x0.6 smd: 1(-1.1,0.95) 2(-1.1,-0.95) 3(1.1,0)
  silkscreen extent -1.63,-1.45 0.22,1.5, body extent -1.2,-1.45 1.2,1.45, height 0.95
SOT95P280X145-6N [mm]
  rect 1.2x0.6 smd: 1(-1.25,0.95) 2(-1.25,0) 3(-1.25,-0.95) 4(1.25,-0.95) 5(1.25,0) 6(1.25,0.95)
  silkscreen extent -1.85,-1.46 0.3,1.6

## Part data
B1: "TVS Diode Array Uni-Directional USBLC6-2SC6 17V, SOT-23 6-Pin", Manufacturer_Name=STMicroelectronics, Mouser Part Number=511-USBLC6-2SC6, Arrow Part Number=USBLC6-2SC6, Arrow Price/Stock=https://www.arrow.com/en/products/usblc6-2sc6/stmicroelectronics.html?utm_currency=USD&region=nac, Datasheet Link=https://www.st.com/resource/en/datasheet/usblc6-2.pdf, Geometry.Height=1.45mm, Manufacturer_Part_Number=USBLC6-2SC6, Mouser Price/Stock=https://www.mouser.co.uk/ProductDetail/STMicroelectronics/USBLC6-2SC6?qs=po45yt2pPpu%2FhNIlwQdTlg%3D%3D
C1 C38: library part 0603X105K250CT, "WALSIN - 0603X105K250CT - SMD Multilayer Ceramic Capacitor, 1 F, 25 V, 0603 [1608 Metric], +/- 10%, X5R", Manufacturer_Name="Walsin Technology Corporation", Datasheet Link=https://g.componentsearchengine.com/Datasheets/2/0603X105K250CT.pdf, Geometry.Height=0.95mm, Manufacturer_Part_Number=0603X105K250CT
C2 C4 C8 C9 C10 C11 C12 C13 C14 C15 C16 C17 C18 C19 C20 C21 C24 C25 C26 C27 C28 C29 C30 C33 C34 C36 C37 C39 C40 C42 C43 C45 C46 C47 C48 C49 C50 C51 C52 C54 C55 C56 C57 C58 C60 C61 C62: library part VJ0603Y104KXACW1BC, "Capacitor", Manufacturer_Name=Vishay, Mouser Part Number=N/A, Arrow Part Number=VJ0603Y104KXACW1BC, Arrow Price/Stock=https://www.arrow.com/en/products/vj0603y104kxacw1bc/vishay?utm_currency=USD&region=nac, Datasheet Link=https://componentsearchengine.com/Datasheets/2/VJ0603Y104KXACW1BC.pdf, Height=0.95mm, Manufacturer_Part_Number=VJ0603Y104KXACW1BC, Mouser Price/Stock=https://www.mouser.co.uk/ProductDetail/Vishay-Vitramon/VJ0603Y104KXACW1BC?qs=M%2FcR%2FDpCXFVPJpohemA31Q%3D%3D
C3 C5 C6 C7 C32 C35: library part CMP-13271-003582-1, "Cap Ceramic 2.2uF 10V X7R ±10% Pad SMD 0603 +125°C T/R", Capacitance=2.2uF, Case Code (Imperial)=0603, Case Code (Metric)=1608, Dielectric=X7R, Max Operating Temperature=125°C, Min Operating Temperature=-55°C, Package Quantity=1, Tolerance=10%, Voltage Rating=10V, Case/Package=0603, Contact Plating=Tin, Depth=0.8mm, Height=0.8mm, Length=1.6mm, Material=Ceramic, Mount="Surface Mount", Packaging="Tape and Reel", Radiation Hardening=No, Thickness=0.035inch, Width=0.031inch
C22 C23: library part C0603C180J5GAC, "Multilayer Ceramic Capacitors MLCC - SMD/SMT 50volts 18pF 5% C0G", Manufacturer_Name=KEMET, Mouser Part Number=80-C0603C180J5GAC, Datasheet Link=https://content.kemet.com/datasheets/KEM_C1003_C0G_SMD.pdf, Geometry.Height=0.87mm, Manufacturer_Part_Number=C0603C180J5GAC, Mouser Price/Stock=https://www.mouser.co.uk/ProductDetail/KEMET/C0603C180J5GAC?qs=zJdl%252BU%252B%2Fz2ks8AeO5ySrAw%3D%3D
C31: library part 0603B223K500CT, "WALSIN - 0603B223K500CT - CAPACITOR, MLCC, X7R, 0.022UF, 50V, 0603", Manufacturer_Name="Walsin Technology Corporation", Mouser Part Number=791-0603B223K500CT, Arrow Part Number=0603B223K500CT, Arrow Price/Stock=https://www.arrow.com/en/products/0603b223k500ct/walsin-technology, Datasheet Link=https://componentsearchengine.com/Datasheets/2/0603B223K500CT.pdf, Geometry.Height=0.87mm, Manufacturer_Part_Number=0603B223K500CT, Mouser Price/Stock=https://www.mouser.co.uk/ProductDetail/Walsin/0603B223K500CT?qs=fIkAfuXiAQLm86jiyfZMMQ%3D%3D
C41: library part CC0603KRX7R6BB474, "Phycomp 0603 Standard 470nF Ceramic Multilayer Capacitor, 10 V dc, +125C, X7R Dielectric, +/-10% SMD", Manufacturer_Name=KEMET, Mouser Part Number=603-CC603KRX7R6BB474, Arrow Part Number=CC0603KRX7R6BB474, Arrow Price/Stock=https://www.arrow.com/en/products/cc0603krx7r6bb474/yageo, Datasheet Link=https://www.yageo.com/upload/media/product/productsearch/datasheet/mlcc/UPY-NP0X7R_MV_100-to-630V_24.pdf, Geometry.Height=0.9mm, Manufacturer_Part_Number=CC0603KRX7R6BB474, Mouser Price/Stock=https://www.mouser.com/Search/Refine.aspx?Keyword=603-CC603KRX7R6BB474
C44 C53: library part CL10A106KP8NNNC, "10F +/-10% 10V Ceramic Capacitor X5R 0603 (1608 Metric)", Manufacturer_Name=SAMSUNG, Mouser Part Number=187-CL10A106KP8NNNC, Arrow Part Number=CL10A106KP8NNNC, Arrow Price/Stock=https://www.arrow.com/en/products/cl10a106kp8nnnc/samsung-electro-mechanics?utm_currency=USD&region=europe, Datasheet Link=https://datasheet.datasheetarchive.com/originals/distributors/Datasheets-DGA10/2415998.pdf, Geometry.Height=0.9mm, Manufacturer_Part_Number=CL10A106KP8NNNC, Mouser Price/Stock=https://www.mouser.co.uk/ProductDetail/Samsung-Electro-Mechanics/CL10A106KP8NNNC?qs=X6jEic%2FHinAlyfRHj7fKwg%3D%3D
C59: library part CMP-02417-000051-1, "CAP CER 0.1UF 50V X7R 0603", Capacitance=100nF, Case Code (Imperial)=0603, Case Code (Metric)=1608, Dielectric=X7R, Dielectric Material=Tantalum, Max Operating Temperature=125°C, Min Operating Temperature=-55°C, Tolerance=10%, Voltage=50V, Case/Package=0603, Construction=Flat, Contact Plating=Tin, Depth=0.8mm, Lead Free="Lead Free", Length=1.6mm, Mount="Surface Mount", Packaging="Cut Tape", Radiation Hardening=No, RoHS Compliant=Yes, Voltage Rating=50V, Voltage Rating (DC)=50V
D1: "TVS Diode (Uni-directional)", Manufacturer_Name=STMicroelectronics, Datasheet Link=https://www.st.com/resource/en/datasheet/smbj12a.pdf, Height=2.45mm, Manufacturer_Part_Number=SMBJ5.0A
D2: "Diode", Arrow Part Number=SS16-E3/61T, Manufacturer_Name=Vishay, Mouser Part Number=625-SS16-E3, Arrow Price/Stock=https://www.arrow.com/en/products/ss16-e361t/vishay?utm_currency=USD&region=europe, Datasheet Link=https://componentsearchengine.com/Datasheets/2/SS16-E3_61T.pdf, Height=2.29mm, Manufacturer_Part_Number=SS16-E3/61T, Mouser Price/Stock=https://www.mouser.co.uk/ProductDetail/Vishay-General-Semiconductor/SS16-E3-61T?qs=x2jpVgRnAtMiLlJLdPGu3w%3D%3D
D5: "Battery", Manufacturer_Name="HY Electronic", Datasheet Link=http://uk.rs-online.com/web/p/products/1711446, Height=2.62mm, Manufacturer_Part_Number=SS14
F1: "Fuse", Manufacturer_Name=BelFuse, Mouser Part Number=530-0ZCF0300BF2C, Arrow Part Number=0ZCF0300BF2C, Arrow Price/Stock=https://www.arrow.com/en/products/0zcf0300bf2c/bel-group, Datasheet Link=https://componentsearchengine.com/Datasheets/1/0ZCF0300BF2C.pdf, Height=1.15mm, Manufacturer_Part_Number=0ZCF0300BF2C, Mouser Price/Stock=https://www.mouser.co.uk/ProductDetail/Bel-Fuse/0ZCF0300BF2C?qs=jyPKP7YLNfCnIt8PHbsbtw%3D%3D
"Ferrite Chip Bead": "Ferrite Bead", Manufacturer_Name=TAI-TECH, Datasheet Link=https://www.tai-tech.com.tw/_upload/files/FCM1608-Series.pdf, Height=0.95mm, Manufacturer_Part_Number=FCM1608KF-601T03
IC1: "Integrated Circuit", Manufacturer_Name=STMicroelectronics, Mouser Part Number=511-STM32F746BGT6, Arrow Part Number=STM32F746BGT6, Arrow Price/Stock=https://www.arrow.com/en/products/stm32f746bgt6/stmicroelectronics?utm_currency=USD&region=nac, Datasheet Link=https://www.st.com/resource/en/datasheet/stm32f746bg.pdf, Height=1.6mm, Manufacturer_Part_Number=STM32F746BGT6, Mouser Price/Stock=https://www.mouser.co.uk/ProductDetail/STMicroelectronics/STM32F746BGT6?qs=E2FFEhwHWtcSD54rSf3kgw%3D%3D
IC2: "Integrated Circuit", Manufacturer_Name="Integrated Silicon Solution Inc.", Mouser Part Number=870-IS42S16400J-7TLI, Arrow Part Number=IS42S16400J-7TLI, Arrow Price/Stock=https://www.arrow.com/en/products/is42s16400j-7tli/integrated-silicon-solution-inc?utm_currency=USD&region=nac, Datasheet Link=http://www.issi.com/WW/pdf/42-45S16400J.pdf, Height=1.2mm, Manufacturer_Part_Number=IS42S16400J-7TLI, Mouser Price/Stock=https://www.mouser.co.uk/ProductDetail/ISSI/IS42S16400J-7TLI?qs=eOmjsnl%2FhF6IYGbICFWNhg%3D%3D
IC3: "Integrated Circuit", Manufacturer_Name=Sensirion, Mouser Part Number=403-SCD41-D-R1, Arrow Part Number=SCD41-D-R1, Arrow Price/Stock=https://www.arrow.com/en/products/scd41-d-r1/sensirion-ag?utm_currency=USD&region=nac, Datasheet Link=https://sensirion.com/media/documents/48C4B7FB/64C134E7/Sensirion_SCD4x_Datasheet.pdf, Height=6.8mm, Manufacturer_Part_Number=SCD41-D-R1, Mouser Price/Stock=https://www.mouser.co.uk/ProductDetail/Sensirion/SCD41-D-R1?qs=HBWAp0VN4Rg1hR6vTmplbw%3D%3D
IC4: "Integrated Circuit", Manufacturer_Name=BOSCH, Mouser Part Number=262-BME688, Arrow Part Number=BME688, Arrow Price/Stock=https://www.arrow.com/en/products/bme688/bosch-sensortec?utm_currency=USD&region=nac, Datasheet Link=https://www.bosch-sensortec.com/media/boschsensortec/downloads/datasheets/bst-bme688-ds000.pdf, Height=1mm, Manufacturer_Part_Number=BME688, Mouser Price/Stock=https://www.mouser.co.uk/ProductDetail/Bosch-Sensortec/BME688?qs=IS%252B4QmGtzzqQoVDscqwx3A%3D%3D
IC5: "Integrated Circuit", Manufacturer_Name="Diodes Incorporated", Mouser Part Number=621-AP63203WU-7, Arrow Part Number=AP63203WU-7, Arrow Price/Stock=https://www.arrow.com/en/products/ap63203wu-7/diodes-incorporated?utm_currency=USD&region=europe, Datasheet Link=https://www.diodes.com/assets/Datasheets/AP63200-AP63201-AP63203-AP63205.pdf, Height=1mm, Manufacturer_Part_Number=AP63203WU-7, Mouser Price/Stock=https://www.mouser.co.uk/ProductDetail/Diodes-Incorporated/AP63203WU-7?qs=u16ybLDytRZ1JqxbuLkMJw%3D%3D
IC6: "Integrated Circuit", Manufacturer_Name="Texas Instruments", Mouser Part Number=595-TPS61165DBVT, Arrow Part Number=TPS61165DBVT, Arrow Price/Stock=https://www.arrow.com/en/products/tps61165dbvt/texas-instruments?utm_currency=USD&region=nac, Datasheet Link=http://www.ti.com/lit/gpn/tps61165, Height=1.45mm, Manufacturer_Part_Number=TPS61165DBVT, Mouser Price/Stock=https://www.mouser.co.uk/ProductDetail/Texas-Instruments/TPS61165DBVT?qs=HM7Ob9npyBILp76tdVJPyQ%3D%3D
IC7: "Integrated Circuit", Manufacturer_Name=Nylofix, Datasheet Link=https://4donline.ihs.com/images/VipMasterIC/IC/PHGL/PHGLS21946/PHGLS21946-1.pdf?hkey=EF798316E3902B6ED9A73243A3159BB0, Height=1.1mm, Manufacturer_Part_Number=2N7002P,235
IC8: "Integrated Circuit", Arrow Part Number=LMV393MM/NOPB, Manufacturer_Name="Texas Instruments", Mouser Part Number=926-LMV393MM/NOPB, Arrow Price/Stock=https://www.arrow.com/en/products/lmv393mmnopb/texas-instruments, Datasheet Link=http://www.ti.com/lit/ds/symlink/lmv393-n.pdf, Height=1.1mm, Manufacturer_Part_Number=LMV393MM/NOPB, Mouser Price/Stock=https://www.mouser.co.uk/ProductDetail/Texas-Instruments/LMV393MM-NOPB?qs=7lkVKPoqpbZkPkHa4IaJJg%3D%3D
J2: "Connector", Arrow Part Number=FH12-40S-0.5SH(55), Manufacturer_Name=Hirose, Mouser Part Number=798-FH12-40S-0.5SH55, Arrow Price/Stock=https://www.arrow.com/en/products/fh12-40s-0.5sh-55/hirose-electric, Datasheet Link=https://datasheet.datasheetarchive.com/originals/distributors/SFDatasheet-1/sf-00023459.pdf, Height=2mm, Manufacturer_Part_Number=FH12-40S-0.5SH(55), Mouser Price/Stock=https://www.mouser.co.uk/ProductDetail/Hirose-Connector/FH12-40S-0.5SH55?qs=Ux3WWAnHpjCB5TtHwQqTgA%3D%3D
J3: "Connector", Manufacturer_Name=SAMTEC, Mouser Part Number=200-FTSH10701LDVKA, Arrow Part Number=FTSH-107-01-L-DV-K-A, Arrow Price/Stock=https://www.arrow.com/en/products/ftsh-107-01-l-dv-k-a/samtec?utm_currency=USD&region=europe, Datasheet Link=http://suddendocs.samtec.com/prints/ftsh-1xx-xx-xxx-dv-xxx-xxx-mkt.pdf, Manufacturer_Part_Number=FTSH-107-01-L-DV-K-A, Mouser Price/Stock=https://www.mouser.co.uk/ProductDetail/Samtec/FTSH-107-01-L-DV-K-A?qs=PB6%2FjmICvI3xEHFou4PhNg%3D%3D
J4: "USB-C (USB TYPE-C) USB 2.0 Receptacle Connector 24 (16+8 Dummy) Position Through Hole, Right Angle, low cost, 3.46mm profile, 16 pin, horizontal, Top mount", Package=None, Availability="In Stock", Check_prices=https://www.snapeda.com/parts/USB4085-GF-A/Global+Connector+Technology/view-part/?ref=eda, MF="Global Connector Technology", MP=USB4085-GF-A, Price=None, Purchase-URL=https://pricing.snapeda.com/search/part/USB4085-GF-A/?ref=eda, SnapEDA_Link=https://www.snapeda.com/parts/USB4085-GF-A/Global+Connector+Technology/view-part/?ref=snap
J15: "Connector", Arrow Part Number=FH12-10S-0.5SH(55), Manufacturer_Name=Hirose, Mouser Part Number=798-FH12-10S-0.5SH55, Arrow Price/Stock=null?utm_currency=USD&region=nac, Datasheet Link=https://www.mouser.com/datasheet/3/731/1/FH12_10S_0.5SH_55__CL0586_0522_3_55_2DDrawing_0000987484.pdf, Height=2.2mm, Manufacturer_Part_Number=FH12-10S-0.5SH(55), Mouser Price/Stock=https://www.mouser.co.uk/ProductDetail/Hirose-Connector/FH12-10S-0.5SH55?qs=Ux3WWAnHpjDbjH5OXeBUGQ%3D%3D
L1: "Inductor", Arrow Part Number="W25Q128JVSIQ TR", Manufacturer_Name=Winbond, Mouser Part Number=454-W25Q128JVSIQTR, Arrow Price/Stock=https://www.arrow.com/en/products/w25q128jvsiqtr/winbond-electronics?utm_currency=USD&region=nac, Datasheet Link=http://www.winbond.com/resource-files/w25q128jv%20spi%20revc%2011162016.pdf, Height=1.95mm, Manufacturer_Part_Number="W25Q128JVSIQ TR", Mouser Price/Stock=https://www.mouser.co.uk/ProductDetail/Winbond/W25Q128JVSIQ-TR?qs=qSfuJ%252Bfl%2Fd7vTyLA9kNdGw%3D%3D
L2: library part CMP-06042-000140-1, "FIXED IND 10UH 1.49A 90 MOHM SMD", Case/Package=2020, Tolerance=20%, Length=5.2mm
L3: library part CMP-2000-06180-1, "High Power Density, High Efficiency, Shielded Inductor, 4.7 uH, -40 to 125 degC, RoHS, Tape and Reel", Current - Saturation=4.37A, Current Rating=3.34A, DC Resistance (DCR)=25.4mOhm, Frequency - Self Resonant=-, Frequency - Test=100kHz, Inductance=4.7µH, Manufacturer=Eaton, Operating Temperature=-40°C~125°C, Package / Case=Nonstandard, Package Description="2-Pin Surface Mount Device, Body 7.6 x 7.6 mm", Tolerance=±20%, Category=Inductors,Coils,Chokes, Datasheet URL=https://datasheet.ciiva.com/14667/0900766b8116a153-14667792.pdf, Datasheet Version=12/2012, Family=FixedInductors, Height - Seated (Max)="0.171\"(4.35mm)", Manufacturer URL=http://www.cooperindustries.com/content/public/en/bussmann/electronics.html, Material - Core=Ferrite, Mounting Technology=SurfaceMount, Mounting Type=SurfaceMount, Package Reference=DR74-4R7-R, Packaging=Tape&amp;Reel(TR), Q @ Freq=-, Ratings=-, Series=DR, Shielding=Shielded, Size / Dimension="0.299\"Lx0.299\"W(7.60mmx7.60mm)", Type=Wirewound
LED1 LED2: "LED", Manufacturer_Name=Kingbright, Mouser Part Number=N/A, Datasheet Link=http://www.farnell.com/datasheets/1655872.pdf, Height=1.2mm, Manufacturer_Part_Number=KPTL-3216SURCK-01-VS, Mouser Price/Stock=https://www.mouser.co.uk/ProductDetail/Kingbright/KPTL-3216SURCK-01-VS?qs=5DWHFlm3M2sATWsF9Oia%2FA%3D%3D
LS1: "Loudspeaker or Buzzer", Manufacturer_Name="PUI Audio", Mouser Part Number=665-SMI1324TW5V3R, Datasheet Link=https://api.puiaudio.com/filename/SMI-1324-TW-5V-3-R.pdf, Height=7.5mm, Manufacturer_Part_Number=SMI-1324-TW-5V-3-R, Mouser Price/Stock=https://www.mouser.co.uk/ProductDetail/PUI-Audio/SMI-1324-TW-5V-3-R?qs=KCAtXnBvhdTXmKSoqYS0Mw%3D%3D
P1: library part CMP-1024-00110-1, "Modified .025\" SQ Post Header, Through-hole, Vertical, -55 to 105 degC, 2.54 mm Pitch, 8-Pin, Male, RoHS", Manufacturer=Samtec, PartNumber=MTSW-104-12-T-D-006, Temperature Range="-55 to 105 degC", ComponentLink1Description="Manufacturer URL", ComponentLink1URL=http://www.samtec.com, ComponentLink2Description=Datasheet, ComponentLink2URL=http://www.samtec.com/documents/webfiles/pdf/MTSW.PDF, ComponentLink3Description="Package Specification", ComponentLink3URL=http://www.samtec.com/documents/webfiles/cpdf/MTSW-XXX-XX-X-X-XXXX-XX-XXX-MKT1.pdf, DatasheetVersion=F-214, Mounting Technology=Through-hole, Orientation=Vertical, PackageDescription="Assembly .025\" [.64] SQ Post Terminal Strip", PackageReference=MTSW-104-12-X-D-006, PackageVersion="BI, 2/1987", Pitch="2.54 mm", RoHS=True
P2: library part CMP-1024-00362-1, "0.025\" SQ Post Header, Through-hole, Vertical, -55 to 125 degC, 2.54 mm Pitch, 10-Pin, Male, RoHS", Manufacturer=Samtec, Temperature Range="-55 to 125 degC", ComponentLink1Description="Manufacturer URL", ComponentLink1URL=http://www.samtec.com, ComponentLink2Description=Datasheet, ComponentLink2URL=http://www.samtec.com/documents/webfiles/pdf/TSW_TH.PDF, ComponentLink3Description="Package Specification", ComponentLink3URL=http://www.samtec.com/documents/webfiles/cpdf/TSW-XXX-XX-XXX-X-XX-XXX-MKT.pdf, DatasheetVersion=F-214, Mounting Technology=Through-hole, Orientation=Vertical, PackageDescription=".025[0.64] SQ. Post Terminal Strip Assembly", PackageReference=TSW-105-05-X-D, PackageVersion="DM, 8/1988", PartNumber=TSW-105-05-G-D, Pitch="2.54 mm", RoHS=True
P3: library part CMP-1502-02331-3, "Terminal Block, 5.08MM, Close Vertical Pcb Header, Thr Type, 4 Pins", Color=Black, Current Rating=10A, Max Operating Temperature=105°C, Min Operating Temperature=-40°C, Voltage Rating=300V, Connector Type="Terminal Block", Contact Material=Brass, Contact Plating=Tin, Gender=Male, Housing Material=Polymer, Lead Pitch=5.08mm, Length=23.12mm, Mount="Through Hole", Number Of Contacts=4, Number of Pins=4, Pitch=5.08mm, REACH SVHC=Unknown, RoHS=Compliant, Termination=PCB
Q1: "Phototransistor", Manufacturer_Name=Everlight, Mouser Part Number=638-PT3346B, Arrow Part Number=PT334-6B, Arrow Price/Stock=https://www.arrow.com/en/products/pt334-6b/everlight-electronics?region=nac, Datasheet Link=https://www.mouser.com/datasheet/2/143/PT334-6B-1663203.pdf, Manufacturer_Part_Number=PT334-6B, Mouser Price/Stock=https://www.mouser.co.uk/ProductDetail/Everlight/PT334-6B?qs=8PzhAHr7IdOmCssrIssUEQ%3D%3D
R1 R2 R3 R4 R5 R6 R13 R14 R22 R23 R24 R25 R26: library part RC0603FR-071KL, "Resistor", Manufacturer_Name=YAGEO, Mouser Part Number=603-RC0603FR-071KL, Arrow Part Number=RC0603FR-071KL, Arrow Price/Stock=https://www.arrow.com/en/products/rc0603fr-071kl/yageo?utm_currency=USD&region=nac, Datasheet Link=https://www.yageo.com/upload/media/product/productsearch/datasheet/rchip/PYu-RC_Group_51_RoHS_L_12.pdf, Height=0.55mm, Manufacturer_Part_Number=RC0603FR-071KL, Mouser Price/Stock=https://www.mouser.co.uk/ProductDetail/YAGEO/RC0603FR-071KL?qs=VU8sRB4EgwApHsk4rF%2F3zg%3D%3D
R7 R9 R10 R11 R12 R17 R18 R19: library part CRCW06034K70JNEAC, "Resistor", Manufacturer_Name=Vishay, Mouser Part Number=71-CRCW06034K70JNEAC, Arrow Part Number=CRCW06034K70JNEAC, Arrow Price/Stock=https://www.arrow.com/en/products/crcw06034k70jneac/vishay?region=nac, Datasheet Link=http://www.vishay.com/docs/28773/crcwce3.pdf, Height=0.55mm, Manufacturer_Part_Number=CRCW06034K70JNEAC, Mouser Price/Stock=https://www.mouser.co.uk/ProductDetail/Vishay-Dale/CRCW06034K70JNEAC?qs=E3Y5ESvWgWMzBuUf0K3dnA%3D%3D
R8: library part RCA0603100KFKEA, "AR03BTCX6R80", Manufacturer_Name=Vishay, Mouser Part Number=71-RCA0603100KFKEA, Arrow Part Number=RCA0603100KFKEA, Arrow Price/Stock=https://www.arrow.com/en/products/rca0603100kfkea/vishay?utm_currency=USD&region=nac, Datasheet Link=https://www.vishay.com/docs/20037/rcae3.pdf, Geometry.Height=0.5mm, Manufacturer_Part_Number=RCA0603100KFKEA, Mouser Price/Stock=https://www.mouser.com/Search/Refine.aspx?Keyword=71-RCA0603100KFKEA
R15: library part CRCW06031K00FKEA, "CRCW0603 Resistor T/R 0.10W,1%,1K Vishay CRCW Series Thick Film Surface Mount Resistor 0603 Case 1k +/-1% 0.1W +/-100ppm/C", Manufacturer_Name=Vishay, Mouser Part Number=71-CRCW0603-1.0K-E3, Arrow Part Number=CRCW06031K00FKEA, Arrow Price/Stock=https://www.arrow.com/en/products/crcw06031k00fkea/vishay?utm_currency=USD&region=nac, Datasheet Link=http://www.vishay.com/docs/20035/dcrcwe3.pdf, Geometry.Height=0.5mm, Manufacturer_Part_Number=CRCW06031K00FKEA, Mouser Price/Stock=https://www.mouser.co.uk/ProductDetail/Vishay-Dale/CRCW06031K00FKEA?qs=CToX950LohJasujQx7GY3g%3D%3D
R16 R21: library part RCA0603100KFKEA, "100 kOhms +/-1% 0.1W, 1/10W Chip Resistor 0603 (1608 Metric) Anti-Sulfur, Automotive AEC-Q200 Thick Film", Manufacturer_Name=Vishay, Mouser Part Number=71-RCA0603100KFKEA, Arrow Part Number=RCA0603100KFKEA, Arrow Price/Stock=https://www.arrow.com/en/products/rca0603100kfkea/vishay?utm_currency=USD&region=nac, Datasheet Link=https://www.vishay.com/docs/20037/rcae3.pdf, Geometry.Height=0.5mm, Manufacturer_Part_Number=RCA0603100KFKEA, Mouser Price/Stock=https://www.mouser.com/Search/Refine.aspx?Keyword=71-RCA0603100KFKEA
R20: library part TNPW0603100RFHEA, "Res Thin Film 0603 100 Ohm 1% 0.1W(1/10W) +/-50ppm/C Sulfur Resistant Pad SMD Automotive Medical T/R", Manufacturer_Name=Vishay, Arrow Part Number=TNPW0603100RFHEA, Arrow Price/Stock=https://www.arrow.com/en/products/tnpw0603100rfhea/vishay, Datasheet Link=https://www.vishay.com/docs/28758/tnpw_e3.pdf, Geometry.Height=0.55mm, Manufacturer_Part_Number=TNPW0603100RFHEA
U1: library part CMP-06284-000011-1, "IC USB TO I2C/UART 14SOIC", Ambient Temperature Range High=+85°C, Ambient Temperature Range Low=-40°C, Manufacturer=Microchip, Max Junction Temp=+150°C, Max Supply Voltage=5.5V, Min Supply Voltage=3V, Nominal Supply Current=10-13mA, Package=C04-065-SL, Temperature="-40°C to +85°C", Automotive=Yes, Automotive Grade="Grade 3", Category=IC, ComponentLink2Description=Datasheet, ComponentLink2URL=http://ww1.microchip.com/downloads/en/DeviceDoc/20005565B.pdf, Data Rate=12Mbits/s, Device Class L1="Integrated Circuits (ICs)", Device Class L2="Interface ICs", Device Class L3="USB Interface ICs", Digikey Description="IC USB TO I2C/UART 14SOIC", Footprint Url=http://ww1.microchip.com/downloads/en/DeviceDoc/14L%20SOIC%203_90%20mm%20%28SL%29%20C04-00065d.pdf, Height=1.75mm, Interface=I2C,UART,USB, Ipc Land Pattern Name=SOIC127P600X175-14, Lead Free=Yes, Manufacturer Part Number=MCP2221A-I/SL, Octopart=https://octopart.com/mcp2221a-i%2Fsl-microchip-71704986, RoHS=TRUE, Standoff Height=0.1mm, Temperature Range High=+85°C, Temperature Range Low=-40°C, Usb Standard="USB 2.0"
VR1: "Variable Resistor", Manufacturer_Name=PIHER, Mouser Part Number=531-PT10MV11104A22S, Datasheet Link=https://www.piher.net/wp-content/uploads/PIHER_PT-10_PTC-10.pdf, Height=6mm, Manufacturer_Part_Number=PT10MV11-104A2020-S, Mouser Price/Stock=https://www.mouser.co.uk/ProductDetail/Amphenol-Piher/PT10MV11-104A2020-S?qs=byeeYqUIh0P%252Byx82Crbo6w%3D%3D
Y1: "Crystal or Oscillator", Manufacturer_Name=ABRACON, Mouser Part Number=815-ABS07-32.768KHZT, Arrow Part Number=ABS07-32.768KHZ-T, Arrow Price/Stock=https://www.arrow.com/en/products/abs07-32.768khz-t/abracon?utm_currency=USD&region=europe, Datasheet Link=https://abracon.com/Resonators/ABS07.pdf, Height=0.9mm, Manufacturer_Part_Number=ABS07-32.768KHZ-T, Mouser Price/Stock=https://www.mouser.co.uk/ProductDetail/ABRACON/ABS07-32.768KHZ-T?qs=3SpAxaLJ01g8GJWeO3sA3Q%3D%3D
Y2: "Crystal or Oscillator", Manufacturer_Name=ABRACON, Mouser Part Number=815-ASCO-8-EK-T3, Arrow Part Number=ASCO-8.000MHZ-EK-T3, Arrow Price/Stock=https://www.arrow.com/en/products/asco-8.000mhz-ek-t3/abracon?utm_currency=USD&region=nac, Datasheet Link=https://abracon.com/Oscillators/ASCO.pdf, Height=0mm, Manufacturer_Part_Number=ASCO-8.000MHZ-EK-T3, Mouser Price/Stock=https://www.mouser.co.uk/ProductDetail/ABRACON/ASCO-8000MHZ-EK-T3?qs=DffVzuaNd2xxqtOgFaJTHg%3D%3D

## Free pads (board coordinates)
  round 5 hole 3.2 unplated paste-2539.97: 13(3.5,3.5) 13(3.5,68) 13(128,3.5) 13(128,68)
  round 1 smd far side paste-2539.97 mask+1: 14(9,4) 14(9,68) 14(122,4)

## Via types
v1: diameter 0.6, hole 0.35, Top Layer to Bottom Layer, 363 vias